# EAGLE board GucciMain (EAGLE 9.1.0)
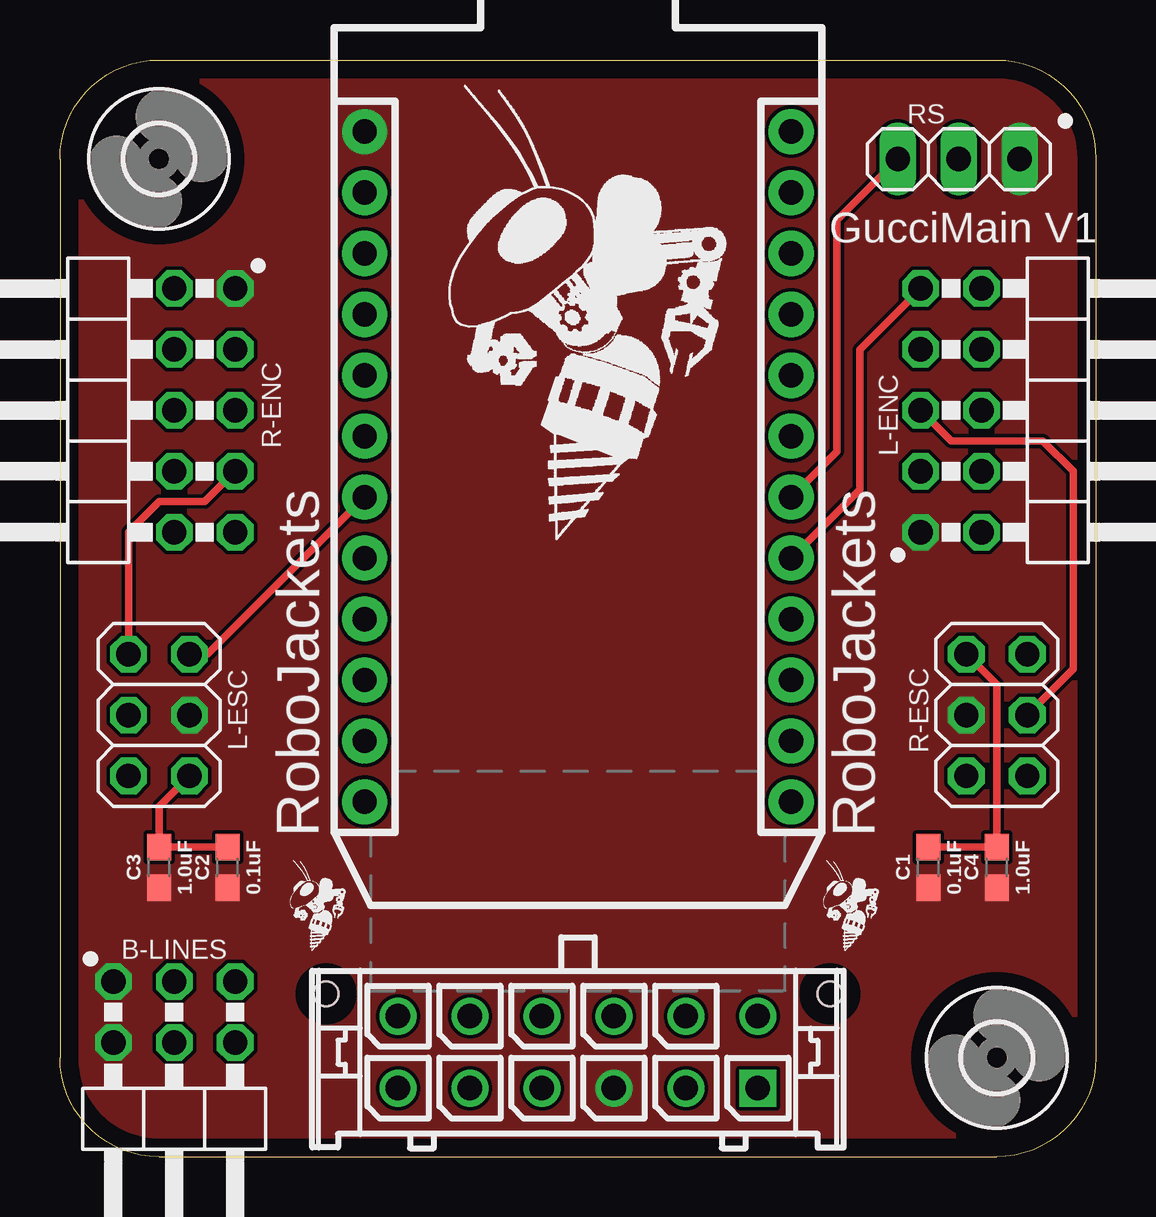
[diagram p0: board, top side]
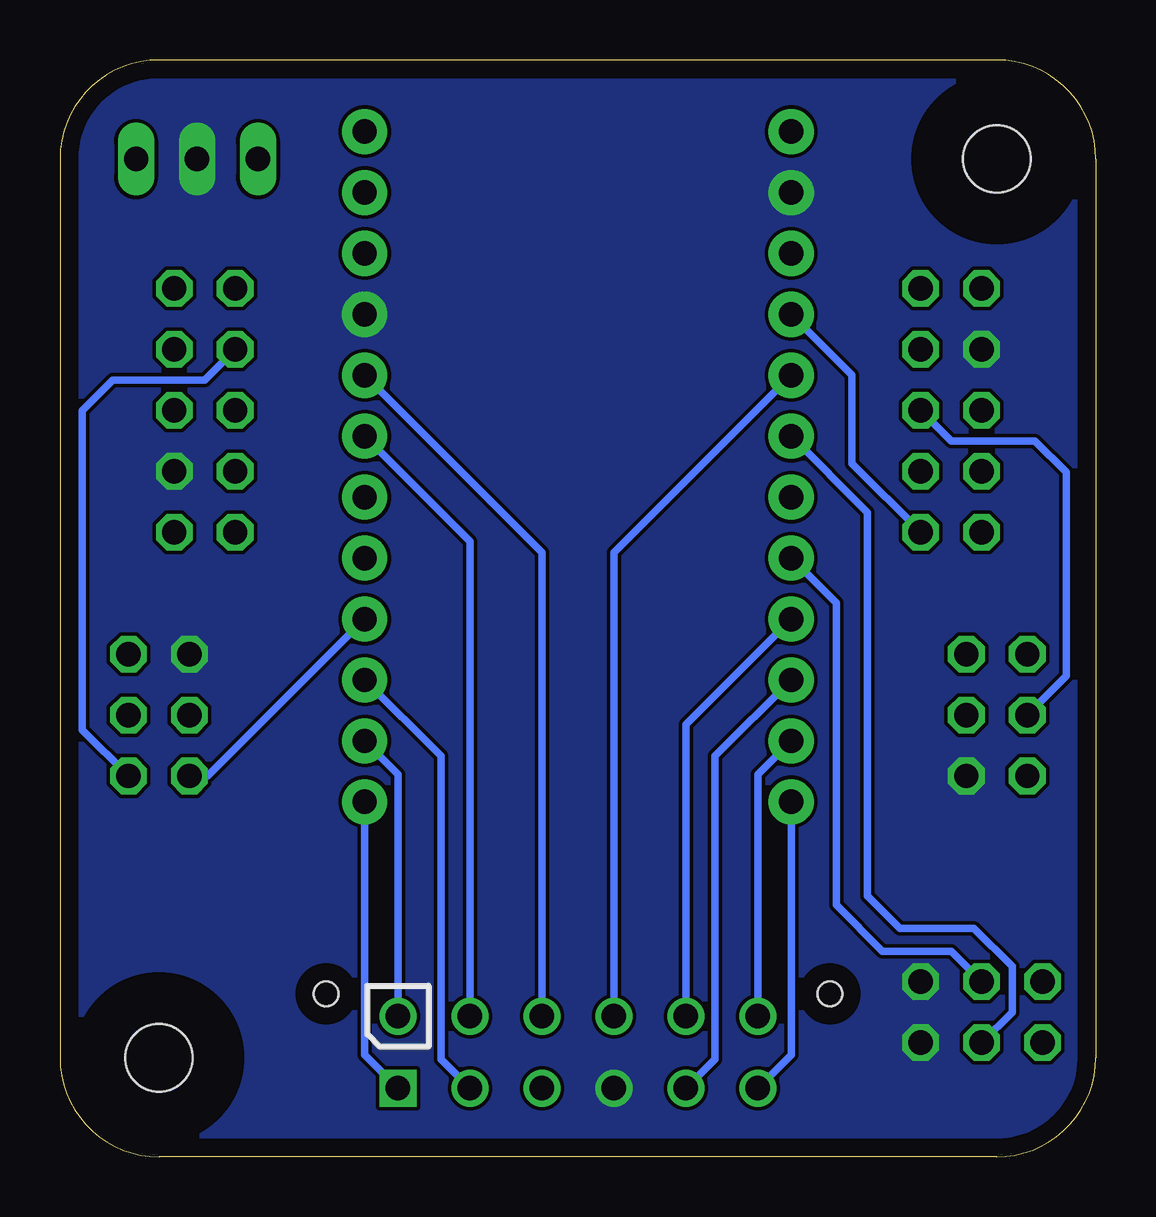
[diagram p1: board, bottom side, seen from below]

Size 43.18 x 45.72 mm. Coordinates in mm from the lower left corner, seen from the top.
Outline: 4.13,0 39.05,0 arc90 43.18,4.13 43.18,41.59 arc90 39.05,45.72 4.13,45.72 arc90 0,41.59 0,4.13 arc90 4.13,0
Copper layers (1*16): Top 0.035mm / dielectric 1.5mm / Bottom 0.035mm
Design rules "Gucci_DRC *": minimum track width 6mil, minimum drill 0.35mm, track to track 6mil, track to pad 6mil, pad to pad 6mil, via to via 6mil, smd to smd 6mil, copper to edge 30mil, drill to drill 6mil, minimum pad ring 10mil, minimum via ring 10mil, stop-mask expansion 4mil, vias tented up to drill 15mil, thermal gap 0mil

## Footprints (pad centres in the part's own frame; a part is rotated, then mirrored left to right if it is on the bottom)
43045-1212 = drill 1.02 square: P$1 7.5,0 | drill 1.02: P$2 4.5,0; P$3 1.5,0; P$4 -1.5,0; P$5 -4.5,0; P$6 -7.5,0; P$7 7.5,3; P$8 4.5,3; P$9 1.5,3; P$10 -1.5,3; P$11 -4.5,3; P$12 -7.5,3 | hole 1.02: 10.5,3.94; -10.5,3.94
2X03/90 = drill 1.016 octagon: 1 -2.54,-6.35; 2 -2.54,-3.81; 3 0,-6.35; 4 0,-3.81; 5 2.54,-6.35; 6 2.54,-3.81
0603 = smd 1.1 x 1: 1 -0.85,0; 2 0.85,0
2X05/90 = drill 1.016 octagon: 1 -5.08,-6.35; 2 -5.08,-3.81; 3 -2.54,-6.35; 4 -2.54,-3.81; 5 0,-6.35; 6 0,-3.81; 7 2.54,-6.35; 8 2.54,-3.81; 9 5.08,-6.35; 10 5.08,-3.81
2X03 = drill 1.016 octagon: 1 -2.54,-1.27; 2 -2.54,1.27; 3 0,-1.27; 4 0,1.27; 5 2.54,-1.27; 6 2.54,1.27
PHOTON = drill 1.016 pad 1.88: 1 1.27,32.258; 2 1.27,29.718; 3 1.27,27.178; 4 1.27,24.638; 5 1.27,22.098; 6 1.27,19.558; 7 1.27,17.018; 8 1.27,14.478; 9 1.27,11.938; 10 1.27,9.398; 11 1.27,6.858; 12 1.27,4.318; 13 19.05,4.318; 14 19.05,6.858; 15 19.05,9.398; 16 19.05,11.938; 17 19.05,14.478; 18 19.05,17.018; 19 19.05,19.558; 20 19.05,22.098; 21 19.05,24.638; 22 19.05,27.178; 23 19.05,29.718; 24 19.05,32.258
1X03 = drill 1.016 long: 1 -2.54,0; 2 0,0; 3 2.54,0
2,8 = hole 2.8: 0,0

## Placement (x,y rotation side)
AUXILIARY_PCB_BUS  [43045-1212]  21.59,2.86 0 top
B-LINES  [2X03/90]  4.76,0.95 180 top
C1  0.1uF  [0603]  36.2,12.06 90 top
C2  0.1uF  [0603]  6.99,12.06 90 top
C3  1.0uF  [0603]  4.13,12.06 90 top
C4  1.0uF  [0603]  39.05,12.06 90 top
L-ENC  [2X05/90]  42.23,31.11 270 top
L-ESC  [2X03]  4.13,18.41 90 top
PHOTON  PHOTON  [PHOTON]  11.43,10.48 0 top
R-ENC  [2X05/90]  0.95,31.11 90 top
R-ESC  [2X03]  39.05,18.41 90 top
RS  [1X03]  37.47,41.59 180 top
U$1  [ROBOBUZZ_1.0X2]  20.64,25.72 0 top
U$2  [2,8]  39.05,4.13 0 top
U$3  [ROBOBUZZ_0.2X]  32.7,8.57 0 top
U$4  [2,8]  4.13,41.59 0 top
U$5  [ROBOBUZZ_0.2X]  10.48,8.57 0 top

## Library data of the parts
AUXILIARY_PCB_BUS = con-molex-micro-fit-3_0
B-LINES L-ENC L-ESC R-ENC R-ESC RS = pinhead
C1 C2 = SparkFun-Capacitors; PROD_ID: CAP-08390
C3 C4 = SparkFun-Capacitors; PROD_ID: CAP-00868
PHOTON = Particle
U$1 U$3 U$5 = RoboJackets-Aesthetics
U$2 U$4 = holes

## Nets
3V3: PHOTON.24
A1: L-ENC.5 R-ESC.3
A2: L-ESC.4 R-ENC.5
B1: L-ENC.3 R-ESC.1
B2: L-ESC.6 R-ENC.3
BL: B-LINES.3 PHOTON.8
BR: B-LINES.4 PHOTON.6
FL: AUXILIARY_PCB_BUS.P$5 PHOTON.10
FR: AUXILIARY_PCB_BUS.P$11 PHOTON.9
GND: AUXILIARY_PCB_BUS.P$4 B-LINES.1 B-LINES.2 C1.2 C2.2 C3.2 C4.2 L-ENC.8 L-ESC.1 PHOTON.2 PHOTON.21 R-ENC.8 R-ESC.6 RS.2
I1: L-ENC.1 PHOTON.17
I2: PHOTON.4 R-ENC.1
L-CONTROL: PHOTON.16 R-ESC.2
R-CONTROL: L-ESC.5 PHOTON.7
RS-OUT: PHOTON.18 RS.3
SCL: AUXILIARY_PCB_BUS.P$7 PHOTON.14
SDA: AUXILIARY_PCB_BUS.P$1 PHOTON.13
SHDN1: AUXILIARY_PCB_BUS.P$6 PHOTON.12
SHDN2: AUXILIARY_PCB_BUS.P$12 PHOTON.11
SHDN3: AUXILIARY_PCB_BUS.P$10 PHOTON.5
SHDN4: AUXILIARY_PCB_BUS.P$2 PHOTON.15
SHDN5: AUXILIARY_PCB_BUS.P$8 PHOTON.19
SHDN6: AUXILIARY_PCB_BUS.P$9 PHOTON.20
VBAT: PHOTON.22
VCC: AUXILIARY_PCB_BUS.P$3 B-LINES.5 B-LINES.6 C1.1 C2.1 C3.1 C4.1 L-ENC.9 L-ESC.3 PHOTON.1 R-ENC.9 R-ESC.4 RS.1

## Tracks (layer width: path | path; a pad name or v marks a point on that pad's centre or on a via)
A1
  Top 0.305: R-ESC.3 42.25,20.34 42.25,28.57 40.98,29.84 37.15,29.84 L-ENC.5
A2
  Bottom 0.305: L-ESC.4 1.23,20.04 1.23,28.54 2.54,29.84 6.03,29.84 R-ENC.5
B1
  Bottom 0.305: R-ESC.1 42.25,17.8 42.25,31.11 40.98,32.38 37.15,32.38 L-ENC.3
B2
  Top 0.305: R-ENC.3 6.03,27.3 4.13,27.3 2.86,26.04 L-ESC.6
BL
  Bottom 0.305: B-LINES.3 6.03,8.57 8.89,8.57 10.82,10.5 10.82,23.08 PHOTON.8
BR
  Bottom 0.305: PHOTON.6 9.53,26.86 9.53,10.87 8.18,9.53 5.08,9.53 3.49,7.94 3.49,6.03 B-LINES.4
FL
  Bottom 0.305: AUXILIARY_PCB_BUS.P$5 15.88,4.07 15.88,16.7 PHOTON.10
FR
  Bottom 0.305: AUXILIARY_PCB_BUS.P$11 17.09,18.03 PHOTON.9
GND
  Top 0.305: R-ESC.6 39.05,19.68 C4.2 C1.2 | L-ESC.1 4.13,14.61 C3.2 C2.2
  pour Bottom (no thermals): 0,45.72 0,0 43.18,0 43.18,45.72
I1
  Top 0.305: PHOTON.17 33.34,27.81 33.34,33.66 L-ENC.1
I2
  Bottom 0.305: R-ENC.1 10.16,28.89 10.16,32.58 PHOTON.4
L-CONTROL
  Bottom 0.305: PHOTON.16 37.02,15.88 R-ESC.2
R-CONTROL
  Top 0.305: L-ESC.5 6.16,20.95 PHOTON.7
RS-OUT
  Top 0.305: PHOTON.18 32.38,29.4 32.38,39.05 RS.3
SCL
  Bottom 0.305: AUXILIARY_PCB_BUS.P$7 29.09,15.95 PHOTON.14
SDA
  Bottom 0.305: AUXILIARY_PCB_BUS.P$1 30.48,4.25 30.48,6.03 PHOTON.13
SHDN1
  Bottom 0.305: AUXILIARY_PCB_BUS.P$6 12.7,4.25 12.7,6.03 PHOTON.12
SHDN2
  Bottom 0.305: AUXILIARY_PCB_BUS.P$12 14.09,15.95 PHOTON.11
SHDN3
  Bottom 0.305: PHOTON.5 20.09,25.19 AUXILIARY_PCB_BUS.P$10
SHDN4
  Bottom 0.305: PHOTON.15 27.3,16.7 27.3,4.07 AUXILIARY_PCB_BUS.P$2
SHDN5
  Bottom 0.305: AUXILIARY_PCB_BUS.P$8 26.09,25.64 PHOTON.19
SHDN6
  Bottom 0.305: AUXILIARY_PCB_BUS.P$9 23.09,25.19 PHOTON.20
VCC
  pour Top (no thermals): 0,45.72 0,0 43.18,0 43.18,45.72

## Text on the board
tNames: GucciMain V1 | RoboJackets | RoboJackets